# Altium PCB PCB2.PcbDoc
Units mm, origin at the board's own origin, x right, y up, seen from the top; angles counter-clockwise.
Board outline 152.4 x 101.6 mm, 2 copper layers (Top Layer, Bottom Layer); 10 components, 8 nets, 55 pads, 0 vias.
Unrouted connection lines stored in the file: 10.
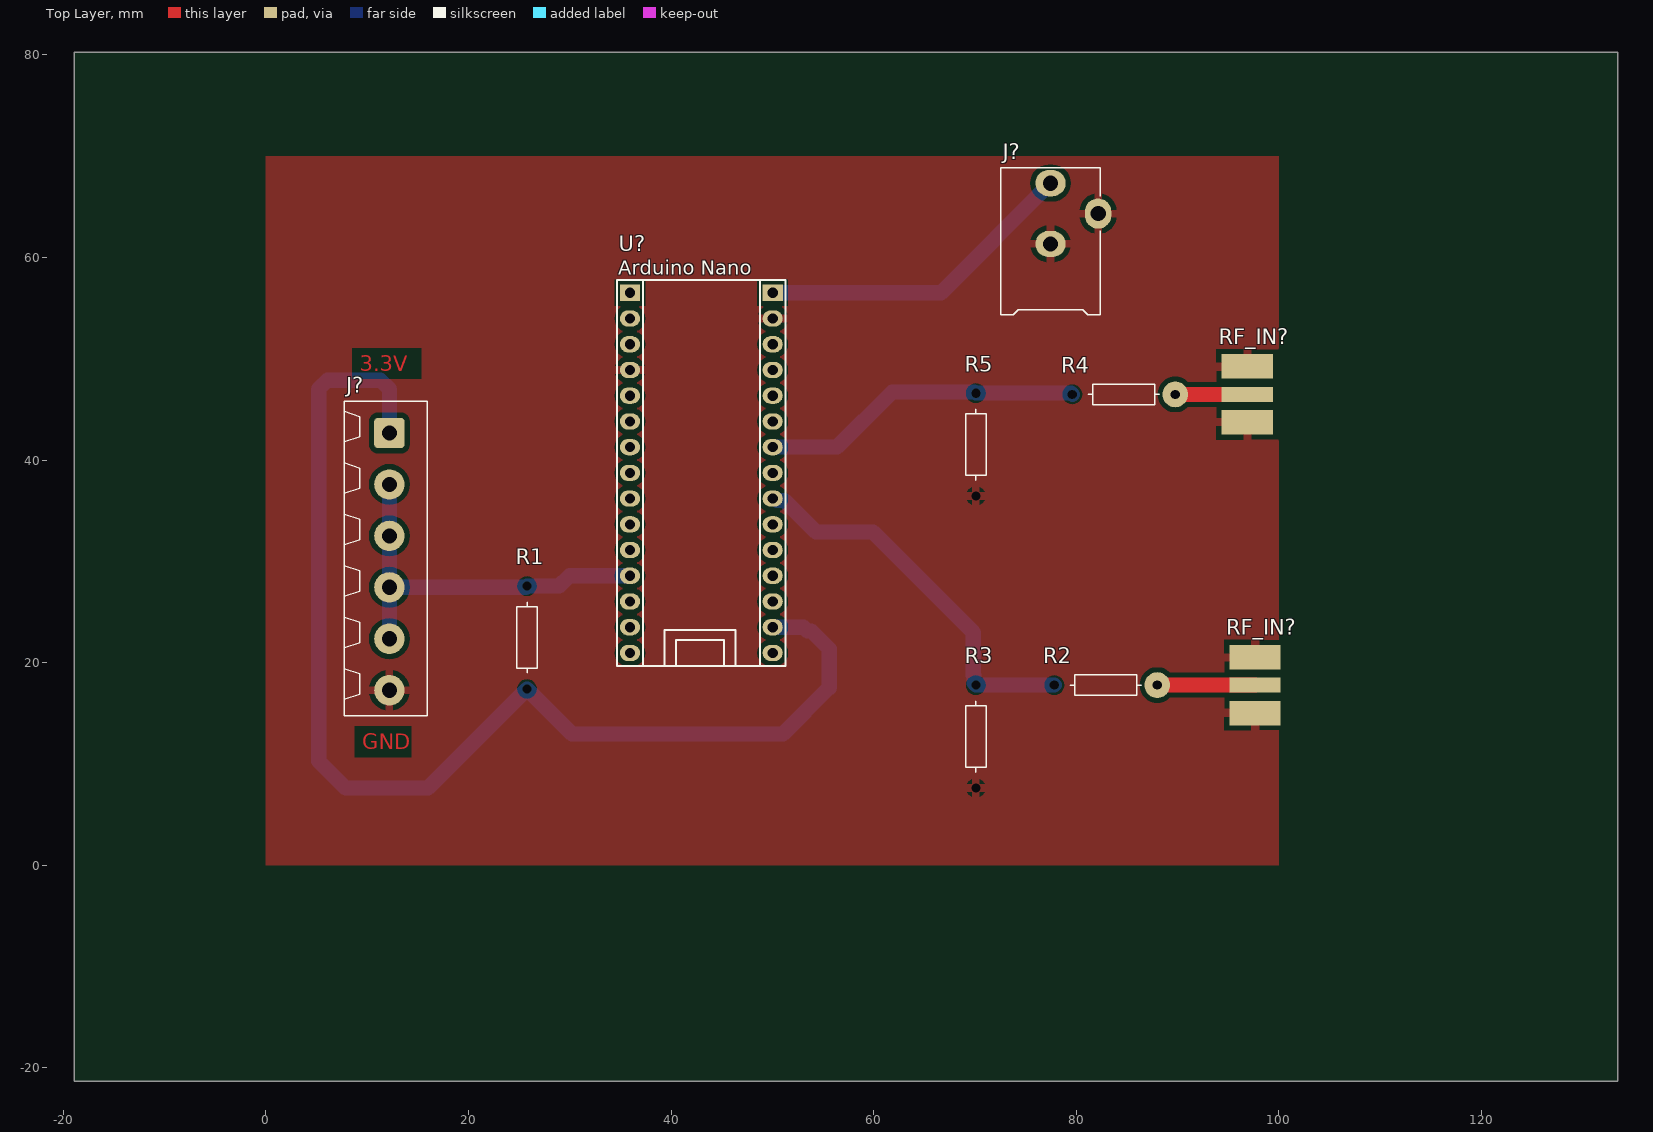
[diagram p0: Top Layer view]
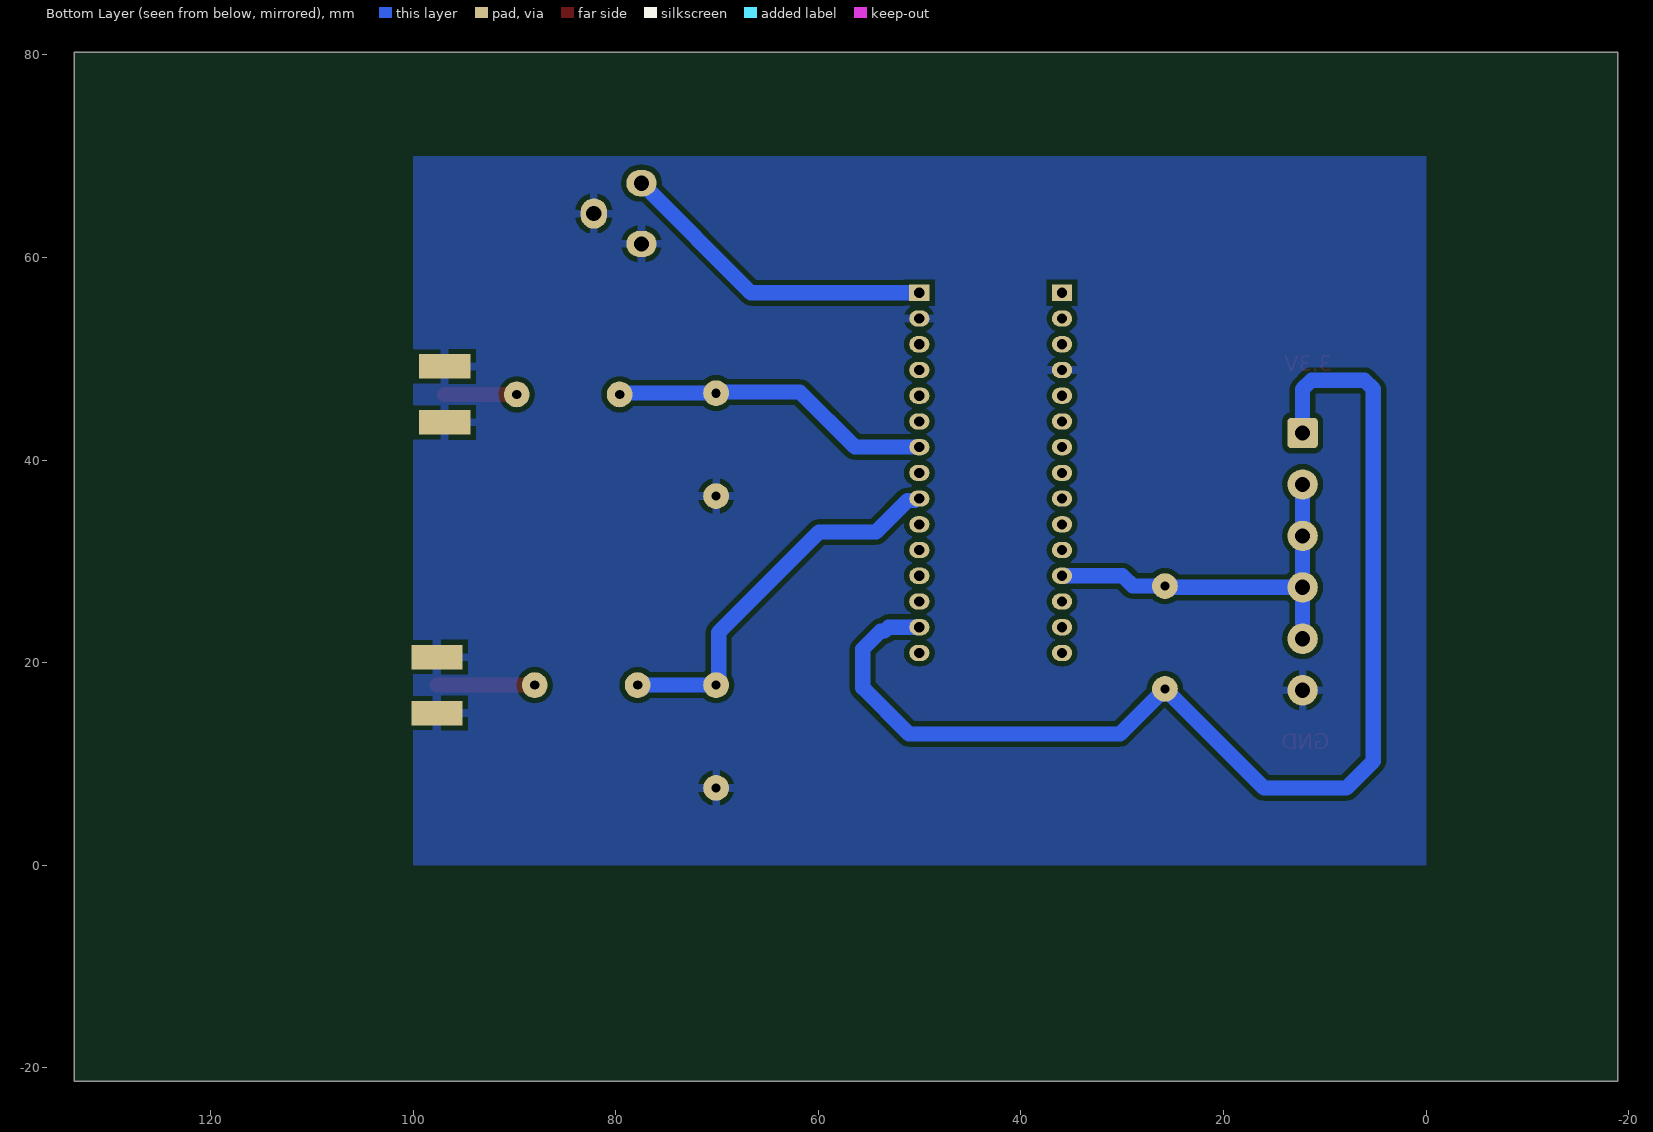
[diagram p1: Bottom Layer view, seen from below]
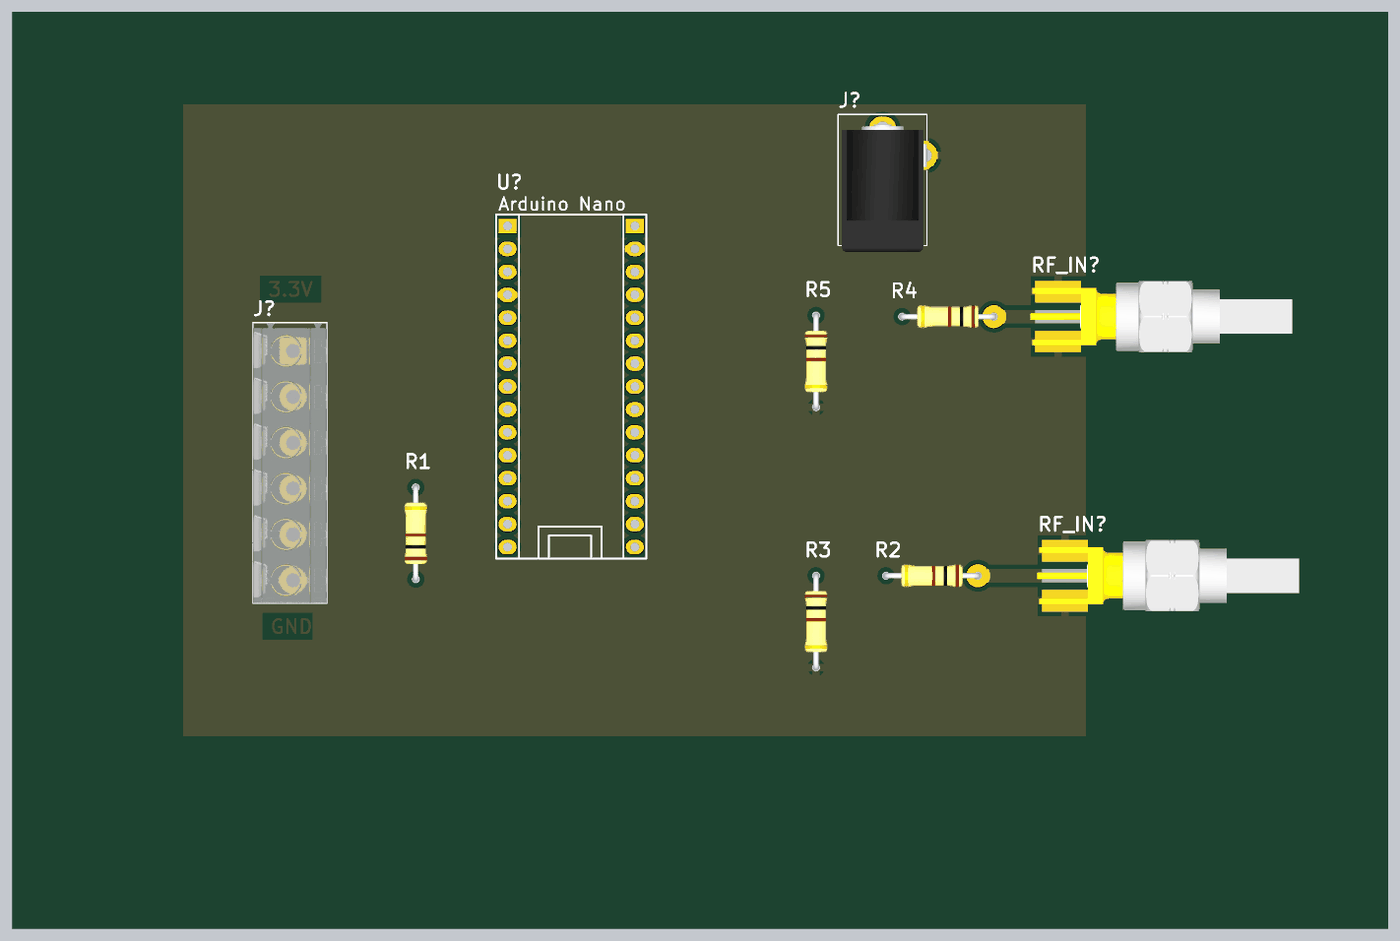
[diagram p2: 3D render of the assembled board from above, using the file's embedded part models]

## Layer stack, top to bottom
Top Solder: solder mask 0.0102, Solder Resist, Dk 3.5
Top Layer: signal copper 0.0356
Dielectric 1: dielectric 0.32, FR-4, Dk 4.8
Bottom Layer: signal copper 0.0356
Bottom Solder: solder mask 0.0102, Solder Resist, Dk 3.5

## Board outline
-18.923,-21.336 133.477,-21.336 133.477,80.264 -18.923,80.264

## Design rules (kind name [scope] priority, off if disabled: settings)
Clearance [All] p1: gap=0.5 ignorepadtopadclearanceinfootprint=FALSE except(0: Arc-Hole Track-Hole SMDPad-Hole THPad-Hole Via-Hole Fill-Hole Poly-Hole Region-Hole Text-Hole)
PlaneConnect [All] p1: planeconnectstyle=Relief reliefexpansion=0.5 reliefentries=4 reliefconductorwidth=1 reliefairgap=0.5
PolygonConnect [All] p1: connectstyle=Relief reliefconductorwidth=0.8 reliefentries=4 polygonreliefangle="90 Angle" airgapwidth=0.5
RoutingVias [All] p1: holewidth=0.711 width=1.27 viastyle="Through Hole" minholewidth=0.711 minwidth=1.27 maxholewidth=0.711 maxwidth=1.27
SolderMaskExpansion [All] p1: expansion=0.102 istentingtop=FALSE
Width [All] p1: maxlimit=3 minlimit=1 preferedwidth=1.5 minimp=50.000000 maximp=50.000000 favimp=50.000000
29 further rules are at their usual default settings.

## Classes and differential pairs
component class arte_sensor: J? R1 R2 R3 R4 R5 RF_IN? U?

## Components (designator, comment, footprint, x,y, rotation, side; value= is the part's Value field where it differs from the comment)
J? "CONN_PWR_JACK_2.1x5.5mm" CONN_PWR_JACK_2.1x5.5mm 77.47,53.641 r180 top value="2.1mm ID, 5.5mm OD"
J? "6P_ScrewTerm_90S" 6P_PCB_ScrewTerm90S 12.192,42.672 r180 top
R1 "Carbon Film" RESTH_AXIAL-0.4#1 25.781,22.479 r90 top value=2.7K
R2 "Carbon Film" RESTH_AXIAL-0.4#2 82.931,17.78 r180 top value=1k
R3 "Carbon Film" RESTH_AXIAL-0.4#1 70.104,12.7 r270 top value=1k
R4 "Carbon Film" RESTH_AXIAL-0.4#2 84.709,46.482 r180 top value=1k
R5 "Carbon Film" RESTH_AXIAL-0.4#1 70.104,41.529 r270 top value=1k
RF_IN? "SMA_CONNECTOR_S" SMA_CONNECTOR 97.663,17.78 r90 top
RF_IN? "SMA_CONNECTOR_S" SMA_CONNECTOR 96.901,46.482 r90 top
U? "Arduino Nano" PCBComponent_1 42.799,37.719 r90 top

## Footprints (in the part's own frame and the unit in brackets; to place one, negate y for a bottom-side part, rotate by r counter-clockwise, add the part's x,y. Pads: shape width x height; smd on the part's side, far side on the other; paste and mask are expansions set on the pad)
6P_PCB_ScrewTerm90S [mm] "TERM BLOCK 6POS SIDE ENT STACKABLE 5.08MM"
  rrect25% 3x3 hole 1.5: 1(0,0)
  round 3 hole 1.5: 2(0,5.08) 3(0,10.16) 4(0,15.24) 5(0,20.32) 6(0,25.4)
  silkscreen extent -3.75,-3.14 4.45,27.94, body extent -3.75,-3.14 4.45,27.94, height 10.02
CONN_PWR_JACK_2.1x5.5mm [mm] "Power Connector, 2.1mm ID, 5.5mm OD"
  oval 3x2.6 hole 1.511: 1(0,-13.7) 2(0,-7.7)
  oval 2.6x3 hole 1.511: 3(-4.7,-10.7)
  silkscreen extent -4.9,-15.22 4.92,-0.7, body extent -4.9,-14.1 4.5,0, height 11
PCBComponent_1 [mm]
  rect 1.6x2 hole 1: 1(18.796,6.858) 30(18.796,-7.239)
  oval 1.6x2 hole 1: 2(16.256,6.858) 3(13.716,6.858) 4(11.176,6.858) 5(8.636,6.858) 6(6.096,6.858) 7(3.556,6.858) 8(1.016,6.858) 9(-1.524,6.858) 10(-4.064,6.858) 11(-6.604,6.858) 12(-9.144,6.858) 13(-11.684,6.858) 14(-14.224,6.858) 15(-16.764,6.858) 16(-16.764,-7.239) 17(-14.224,-7.239) 18(-11.684,-7.239) 19(-9.144,-7.239) 20(-6.604,-7.239) 21(-4.064,-7.239) 22(-1.524,-7.239) 23(1.016,-7.239) 24(3.556,-7.239) 25(6.096,-7.239) 26(8.636,-7.239) 27(11.176,-7.239) 28(13.716,-7.239) 29(16.256,-7.239)
  silkscreen extent -18.03,-8.51 20.07,8.13
RESTH_AXIAL-0.4#1 [mil]
  round 0 / inner round 0 / far side round 100 hole 36 unplated: 1(-200,0) 2(200,0)
  silkscreen extent -138,-40 138,40, body extent -212,-50 212,50, height 102
RESTH_AXIAL-0.4#2 [mil]
  round 100 / inner round 0 / far side round 100 hole 36 unplated: 1(-200,0)
  round 0 / inner round 0 / far side round 100 hole 36 unplated: 2(200,0)
  silkscreen extent -138,-40 138,40, body extent -212,-50 212,50, height 102
SMA_CONNECTOR [mm]
  rect 2.415x5.08 all layers, no hole paste+0 mask+0: 1(-2.76,0)
  rect 1.47x5.08 smd mask+0: 2(0,0)
  rect 2.415x5.08 all layers, no hole mask+0: 3(2.76,0)
  body extent -3.95,-25.9 3.95,3.08, height 4.51

## Part data
J?: "Power Connector, THT, 2.1mm ID, 5.5mm OD", Manufacturer 1="CUI Inc", Manufacturer Part Number 1=PJ-102AH, Package / Case="PCB mount", Supplier Part Number 1=CP-102AH-ND, Category=Connectors, Mounting Type="Through Hole", Supplier 1=Digi-Key
J?: "TERM BLOCK 6POS SIDE ENT STACKABLE 5.08MM", Color=Black, Current=10A, Manufacturer 1="Tyco Electronics", Manufacturer Part Number 1=1776119-6, Package / Case="Side Entry; 5.08mm pitch", Supplier Part Number 1=A97988-ND, Voltage=300V, Category="Connectors Interconnects", ComponentLink1Description=http://documents.tycoelectronics.com/commerce/DocumentDelivery/DDEController?Action=srchrtrv&DocNm=1776119&DocType=CD&DocLang=EN, ComponentLink1URL=http://documents.tycoelectronics.com/commerce/DocumentDelivery/DDEController?Action=srchrtrv&DocNm=1776119&DocType=CD&DocLang=EN, Features=-, Mating Orientation="Horizontal with Board", Mounting Type="Through Hole", Number of Levels=1, Pitch="0.200\" (5.08mm)", Positions Per Level=6, Supplier 1=Digi-Key, Terminal Block Type="Wire to Board", Termination=Screw, Wire Gauge="15-17 AWG"
R1 R2 R3 R4 R5: library part RES_1K_Axial_0.25W_5%, "Resistor THD Axial 1k Ohm 0.25W 5% Carbon Film", Manufacturer 1=Yageo, Manufacturer Part Number 1=CFR-25JB-1K0, Package / Case=Axial, Ratings=1/4W, Supplier Part Number 1=1.0KQBK-ND, Tolerance=±5%, Supplier 1=Digi-Key
U?: library part Component_1

## Nets (pads, with @x,y where several pads share a name; then routed paths per layer and width w, separated by ;. In a path a pad name is that pad's centre, name@x,y a point inside that pad or via, vN(x,y) a via of type N, cw(c..) or ccw(c..) an arc to the next point about the centre after c; other vN are vias at no path point)
+3.3: J?.1@12.192,42.672 R1.1 U?.17 | length 118.4
  Bottom Layer w1.5: J?.1@12.192,42.672 12.192,47 11.313,47.879 6.086,47.879 5.207,47 5.207,10.287 7.874,7.62 16.002,7.62 R1.1 30.226,12.954 51.054,12.954 55.626,17.526 55.626,21.336 53.848,23.114 53.467,23.114 53.086,23.495 U?.17
GND: J?.2@77.47,61.341 J?.3@82.17,64.341 J?.6 R3.2 R5.2 RF_IN?.1 RF_IN?.3 U?.4 U?.29
NetJ?_1: J?.1@77.47,67.341 U?.30 | length 32.4
  Top Layer w1.5: J?.1@76.993,67.341 J?.1@77.47,67.341
  Bottom Layer w1.5: U?.30 66.644,56.515 J?.1@77.47,67.341
NetJ?_2: J?.2@12.192,37.592 J?.3@12.192,32.512 J?.4 J?.5 R1.2 U?.12 | length 39.5
  Bottom Layer w1.5: J?.5 J?.4 ; J?.2@12.192,37.592 12.192,32.512 J?.4 ; U?.12 29.972,28.575 28.956,27.559 R1.2 25.654,27.432 J?.4
NetR2_1: R2.1 RF_IN?.2@97.663,17.78 | length 9.7
  Top Layer w1.5: R2.1 RF_IN?.2@97.663,17.78
NetR2_2: R2.2 R3.1 U?.22 | length 38.3
  Bottom Layer w1.5: U?.22 50.265,36.195 50.455,36.005 51.211,36.005 54.323,32.893 59.944,32.893 69.85,22.987 69.85,18.769 69.905,18.714 69.905,17.979 R3.1 R2.2
NetR4_1: R4.1 RF_IN?.2@96.901,46.482 | length 7.1
  Top Layer w1.5: R4.1 RF_IN?.2@96.901,46.482
NetR4_2: R4.2 R5.1 U?.24 | length 32
  Bottom Layer w1.5: U?.24 56.388,41.275 61.849,46.736 69.977,46.736 R5.1 79.502,46.609 R4.2
pads on no net: U?.1 U?.2 U?.3 U?.5 U?.6 U?.7 U?.8 U?.9 U?.10 U?.11 U?.13 U?.14 U?.15 U?.16 U?.18 U?.19 U?.20 U?.21 U?.23 U?.25 U?.26 U?.27 U?.28

## Polygon pours and split planes (outlines as drawn)
GND on Bottom Layer "GND_L02_P000" (solid, pour order 0): 0,0 0,70 100,70 100,0
GND on Top Layer "GND_L01_P001" (solid, pour order 1): 0,0 0,70 100,70 100,0

## Other copper
Top Layer:
  text "3.3V" at 9.271,48.768 h1.52
  text "GND" at 9.525,11.43 h1.52

## Silkscreen, mask and mechanical layers (free items; w line width, h text height)
Mechanical 1:
  lines w0.254: 0,0 100,0 100,70 0,70 0,0